# Altium PCB nRF52_UWB_MPU_ADIS_V1.0.pcbdoc
Units mil, origin at the board's own origin, x right, y up, seen from the top; angles counter-clockwise.
Board outline 44435.04 x 2724.99 mil, 2 copper layers (Top Layer, Bottom Layer); 30 components, 30 nets, 167 pads, 76 vias.
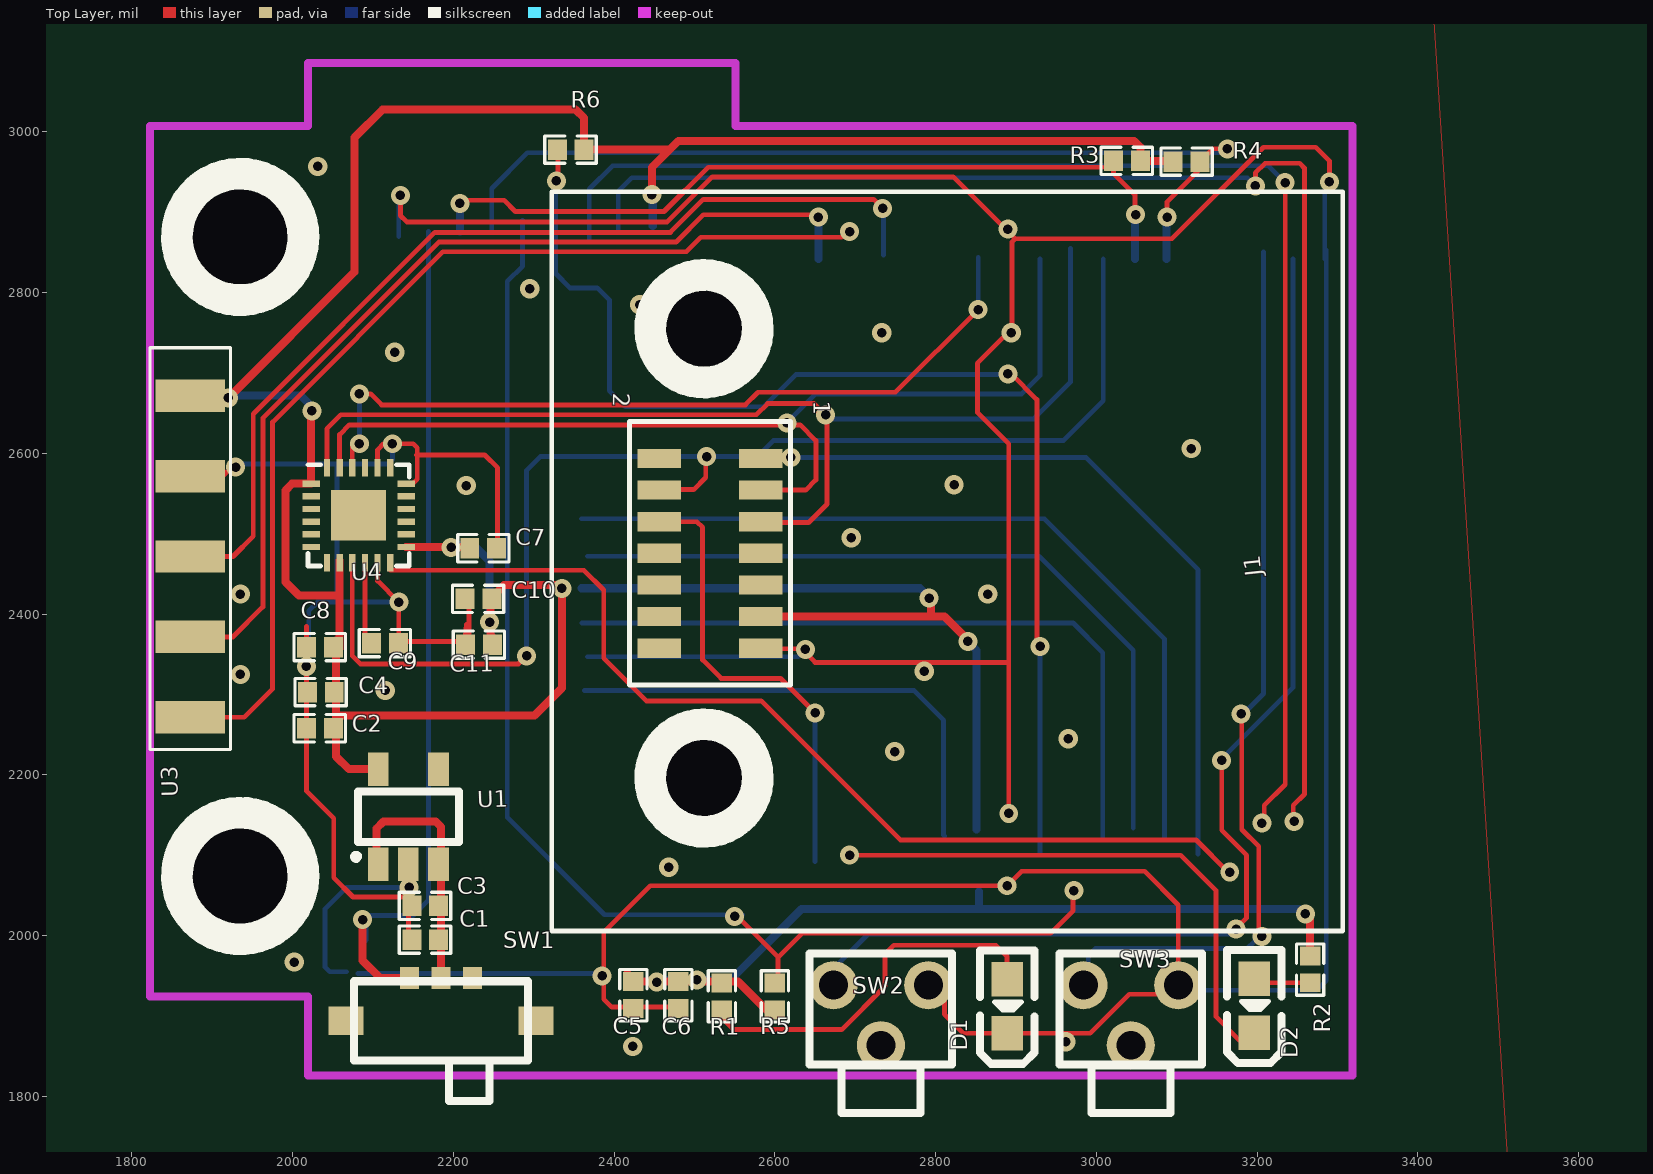
[diagram p0: Top Layer view]
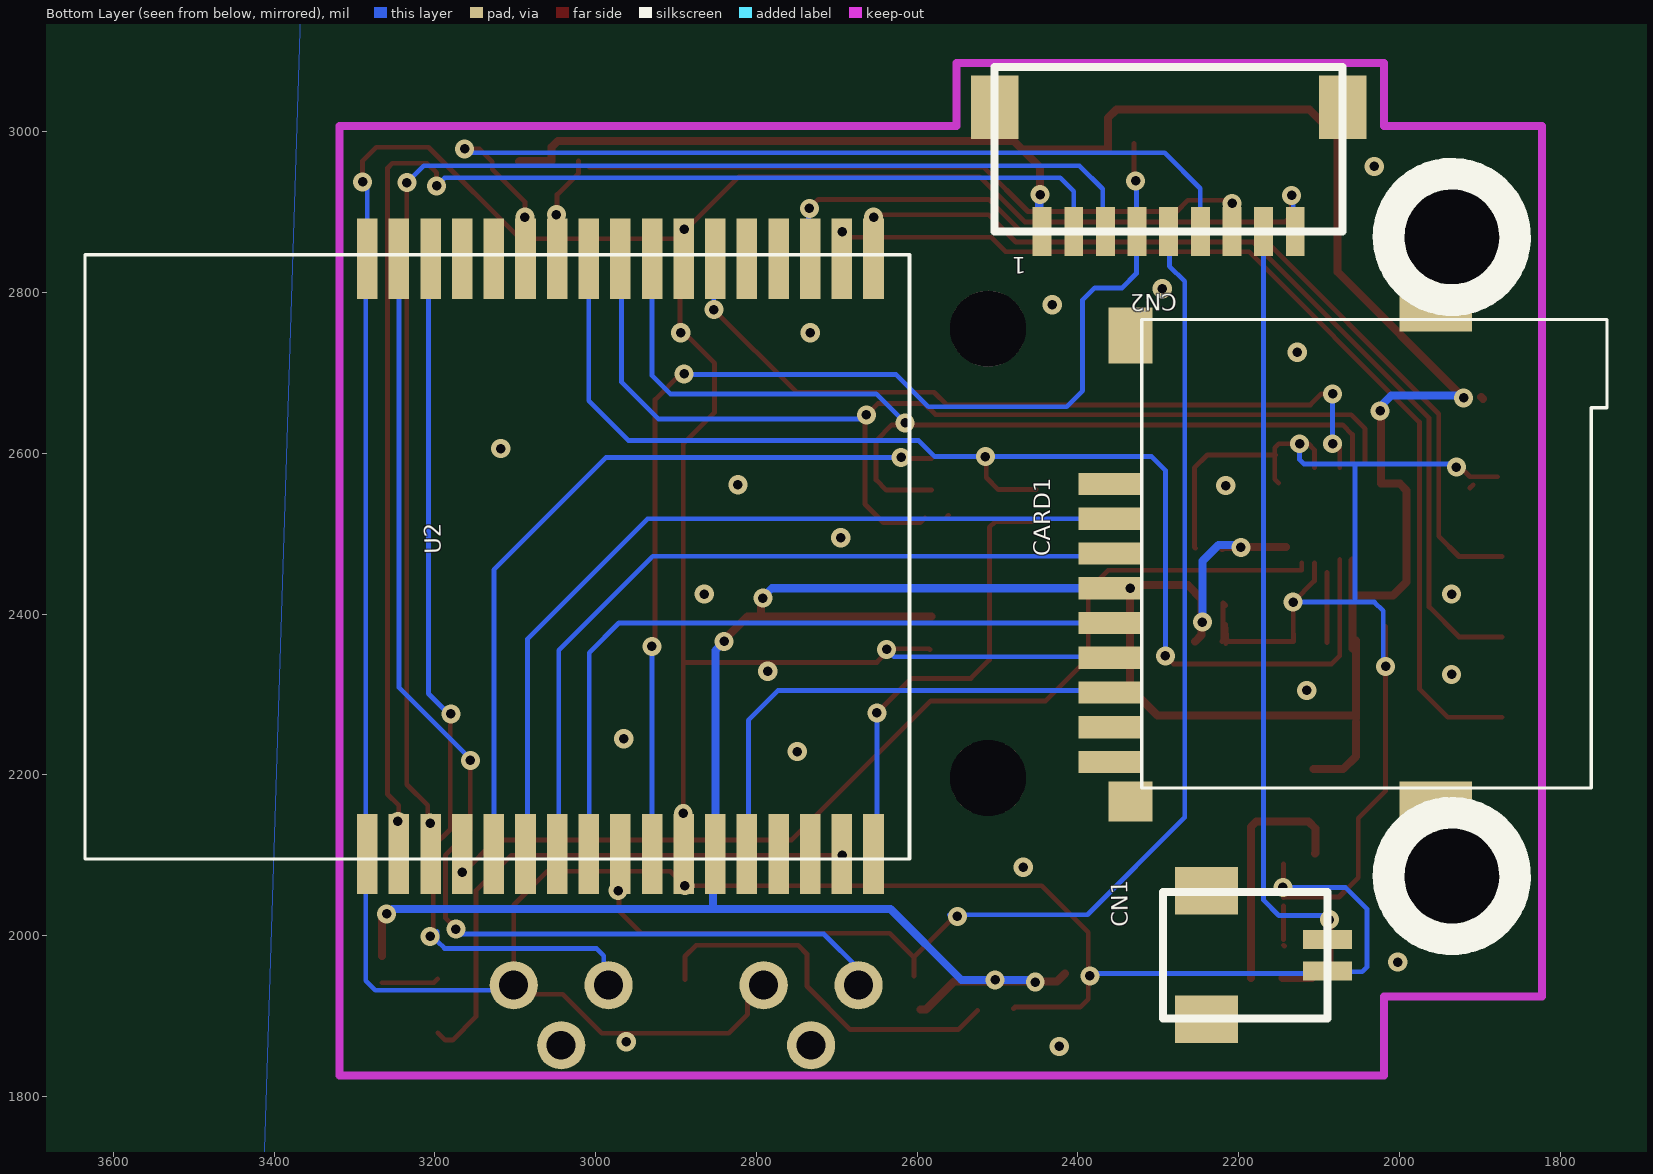
[diagram p1: Bottom Layer view, seen from below]

## Layer stack, top to bottom
Top Layer: signal copper (thickness not stored)
Dielectric: dielectric 12.6, FR-4, Dk 4.8
Bottom Layer: signal copper (thickness not stored)

## Board outline
45435.04,1000 1000,1000 1000,3724.99 45435.04,3724.99

## Components (designator, comment, footprint, x,y, rotation, side; value= is the part's Value field where it differs from the comment)
C1 "10uF" 0402#1 2165,1994.99 r0 top
C2 "10uF" 0402#1 2034,2257.99 r0 top
C3 "100nF" 0402#2 2165,2036.99 r0 top
C4 "100nF" 0402#1 2035,2302.99 r0 top
C5 "10uF" 0402#1 2424,1925.99 r90 top
C6 "100nF" 0402#2 2480,1925.99 r90 top
C7 "10nF" 0402#1 2237,2481.99 r180 top
C8 "100nF" 0402#1 2034,2358.99 r0 top
C9 "100nF" 0402#1 2115,2363.99 r0 top
C10 "10uF" 0402#1 2231,2418.99 r0 top
C11 "1uF" 0402#2 2232,2361.99 r0 top
CARD1 "HYC77-TF09-200" TF-015 2157.05,2471.71 r270 bottom
CN1 "A1002WV-S-2P" A1002WR-S-2P_LEO 2164.92,1975.65 r90 bottom
CN2 "A1002WR-S-9P" A1002WR-S-9P_LEO 2286.97,2952.03 r180 bottom
D1 "RED" LED-0603 2889,1911.99 r90 top
D2 "GREEN" LED-0603 3196.42,1912.66 r90 top
J1 "CLM-107-02-XX-D" *CLM-107-02-XX-D_2 2519.25,2475.65 r270 top
R1 "1K" 0402#1 2534,1923.99 r270 top
R2 "200" 0402#2 3266,1957.99 r90 top
R3 "10K" 0402#2 3038,2963.99 r0 top
R4 "10K" 0402#2 3112,2962.99 r180 top
R5 "10K" 0402#3 2600,1923.99 r270 top
R6 "10K" 0402#3 2346,2977.99 r0 top
SW1 "SSAJ120100" SW-SMD-5.5X2.5 2184.61,1920.53 r0 top
SW2 "KAN4562-0501C" KAN4562-0501C 2731.9,1900.89 r0 top
SW3 "KAN4562-0501C" KAN4562-0501C 3042.9,1900.89 r0 top
U1 "SPX3819M5-L-3-3/TR" SOT-23-5 2144,2147.99 r90 top
U2 "DWM1001" DWM1001 3121.61,2471.71 r270 bottom
U3 "GPS_Header" GPS_HEADER_SMT_NEW 1822.4,1955.96 r90 top
U4 "MPU-9250" QFN-24-1EP_3X3MM_PITCH0.4MM 2082,2522.99 r0 top

## Footprints (in the part's own frame and the unit in brackets; to place one, negate y for a bottom-side part, rotate by r counter-clockwise, add the part's x,y. Pads: shape width x height; smd on the part's side, far side on the other; paste and mask are expansions set on the pad)
0402#1 [mil]
  rect 23.62x25.6 smd: 1(-16.7,0) 2(16.7,0)
  silkscreen extent -32,-17 32,17
0402#2 [mil]
  rect 23.62x25.59 smd: 1(-16.7,0) 2(16.7,0)
  silkscreen extent -32,-17 32,17
0402#3 [mil]
  rect 23.62x25.58 smd: 1(-16.7,0) 2(16.7,0)
  silkscreen extent -32,-17 32,17
*CLM-107-02-XX-D_2 [mil]
  rect 24x54 smd: 1(-118.11,63) 2(-118.11,-63) 3(-78.74,63) 4(-78.74,-63) 5(-39.37,63) 6(-39.37,-63) 7(0,63) 8(0,-63) 9(39.37,63) 10(39.37,-63) 11(78.74,63) 12(78.74,-63) 13(118.11,63) 14(118.11,-63)
  round 94.49 hole 94.48 unplated: ""(-279.53,-7.48) ""(279.53,-7.48)
  silkscreen extent -450,-197 470,787
A1002WR-S-2P_LEO [mm]
  rect 0.6x1.55 smd: 1(-0.501,-1.924) 2(0.499,-1.924)
  rect 1.5x2 smd: 3(-2.032,1.905) 4(2.032,1.905)
  silkscreen extent -2,-1.92 2,3.27
A1002WR-S-9P_LEO [mm]
  rect 0.6x1.55 smd: 1(-4,-1.923) 2(-3,-1.923) 3(-1.997,-1.926) 4(-1,-1.923) 5(0,-1.923) 6(1,-1.923) 7(1.999,-1.923) 8(3,-1.923) 9(4,-1.923)
  rect 1.5x2 smd: 10(-5.499,1.999) 11(5.5,1.999)
  silkscreen extent -5.5,-1.92 5.5,3.28
DWM1001 [mm]
  rect 2.54x0.65 smd: 1(9.404,-4.129) 2(9.404,-3.129) 3(9.404,-2.129) 4(9.404,-1.129) 5(9.404,-0.129) 6(9.404,0.871) 7(9.404,1.871) 8(9.404,2.871) 9(9.404,3.871) 10(9.404,4.871) 11(9.404,5.871) 12(9.404,6.871) 13(9.404,7.871) 14(9.404,8.871) 15(9.404,9.871) 16(9.404,10.871) 17(9.404,11.871) 18(-9.406,11.871) 19(-9.406,10.871) 20(-9.406,9.871) 21(-9.406,8.871) 22(-9.406,7.871) 23(-9.406,6.871) 24(-9.406,5.871) 25(-9.406,4.871) 26(-9.406,3.871) 27(-9.406,2.871) 28(-9.406,1.871) 29(-9.406,0.871) 30(-9.406,-0.129) 31(-9.406,-1.129) 32(-9.406,-2.129) 33(-9.406,-3.129) 34(-9.406,-4.129)
  silkscreen extent -9.54,-13.05 9.56,13.02
GPS_HEADER_SMT_NEW [mm]
  rect 1.02x2.2 smd: 1(18.18,-1.27) 2(15.64,-1.27) 3(13.1,-1.27) 4(10.56,-1.27) 5(8.02,-1.27)
  round 3 hole 3 slot 3 at 90 deg unplated: ""(3,-2.85) ""(23.2,-2.85)
  silkscreen extent 1,-4.85 25.2,0
KAN4562-0501C [mil]
  round 60 hole 36: 0(0,-37.4) 1(-59.05,37.4) 2(59.06,37.4)
  silkscreen extent -89,-122 89,77
LED-0603 [mil]
  rect 43x39 smd: 1(33.5,0) 2(-33.5,0)
  silkscreen extent -72,-34 70,34
QFN-24-1EP_3X3MM_PITCH0.4MM [mil]
  rect 21.65x7.87 smd: 1(-59.06,39.37) 2(-59.06,23.62) 3(-59.06,7.87) 4(-59.06,-7.87) 5(-59.06,-23.62) 6(-59.06,-39.37) 13(59.06,-39.37) 14(59.06,-23.62) 15(59.06,-7.87) 16(59.06,7.87) 17(59.06,23.62) 18(59.06,39.37)
  rect 7.87x21.65 smd: 7(-39.36,-59.06) 8(-23.62,-59.06) 9(-7.87,-59.06) 10(7.88,-59.06) 11(23.62,-59.06) 12(39.38,-59.06) 19(39.38,59.05) 20(23.62,59.05) 21(7.88,59.05) 22(-7.87,59.05) 23(-23.62,59.05) 24(-39.36,59.05)
  rect 34.45x31.5 smd: 25(-17.12,-15.75) 25(-17.12,15.75) 25(17.13,-15.75) 25(17.13,15.75)
  silkscreen extent -63,-63 63,63
SOT-23-5 [mm]
  rect 1.06x0.65 smd: 1(-1.5,0.95) 2(-1.5,0) 3(-1.5,-0.95) 4(1.5,-0.95) 5(1.5,0.95)
  silkscreen extent -1.33,-1.6 0.8,1.71
SW-SMD-5.5X2.5 [mm]
  rect 0.6x0.7 smd: 1(-1,0.675) 2(1,0.675) C(0,0.675)
  rect 1.1x0.9 smd: 4(-3,-0.675) 5(3,-0.675)
  silkscreen extent -2.75,-3.21 2.75,0.58
TF-015 [mm]
  rect 0.7x2 smd: 1(-2.292,-5.145) 2(-1.192,-5.143) 3(-0.096,-5.145) 4(1.004,-5.145) 5(2.103,-5.145) 6(3.201,-5.145) 7(4.297,-5.145) 8(5.395,-5.145) 9(6.499,-5.145)
  rect 1.27x1.397 smd: 10(7.747,-4.507)
  rect 1.27x2.286 smd: 11(7.747,5.145) 12(-7.747,5.145)
  rect 1.778x1.397 smd: 13(-6.985,-4.507)
  silkscreen extent -7.49,-4.15 7.32,10.56

## Via types
v1: diameter 23.62, hole 11.82, Top Layer to Bottom Layer, 55 vias
v2: diameter 24, hole 11.82, Top Layer to Bottom Layer, 21 vias

## Nets (pads, with @x,y where several pads share a name; then routed paths per layer and width w, separated by ;. In a path a pad name is that pad's centre, name@x,y a point inside that pad or via, vN(x,y) a via of type N, cw(c..) or ccw(c..) an arc to the next point about the centre after c; other vN are vias at no path point)
BUTTON_RST: SW2.1 U2.33 | length 1431.7
  Top Layer w6: v1@3156,2219.99 3156,2130.99 3187,2099.99 3187,2021.99 3181.65,2016.64 v1@3170.65,2016.64
  Bottom Layer w6: SW2.1 2672.8,1958.79 2716,2001.99 3168,2001.99 v1(3174,2007.99) ; v1@3155,2218.99 3244.79,2308.78 U2.33
  other v1: 3156,2217.99
BUTTON_SDCARD: SW3.1 U2.32 | length 1142
  Top Layer w6: v1(3180,2275.99) 3181,2274.99 3181,2131.99 3202,2110.99 v1@3202,1998.99
  Bottom Layer w6: SW3.1@2990,1932.99 2990,1974.99 2999,1983.99 3188,1983.99 3197,1992.99 v1@3197,2004.99 ; v1@3181.5,2274.49 3208,2300.99 U2.32@3208,2850.99
  other v1: 3206,1998.99
CHARGE_VC: CN1.2 CN2.8 SW1.1 | length 1068.5
  Top Layer w10: v1@2088,2019.99 2087,2018.99 2087,1968.99 2108.89,1947.1 SW1.1
  Bottom Layer w6: v1(2087,2019.99) 2092,2024.99 2150,2024.99 2168.87,2043.86 CN2.8
  Bottom Layer w10: v1(2087,2019.99) 2089.16,2017.83 CN1.2
D2_1: D2.1 R2.1 | length 71.6
  Top Layer w6: D2.1 3201.29,1941.29 R2.1
FOOT_2: CN2.4 R6.1 U2.10 | length 1493.8
  Top Layer w6: v1(2328,2938.99) 2330,2940.99 R6.1@2330,2985.99 ; v1(2890,2698.99) 2894,2698.99 2926,2666.99 2926,2363.99 v1(2930,2359.99)
  Bottom Layer w6: v1@2327,2937.99 2327,2823.99 2345,2805.99 2379,2805.99 2394,2790.99 2394,2677.99 2414,2657.99 2586,2657.99 2626,2697.99 v1@2890,2697.99 ; U2.10 v1@2929.83,2360.99
FOOT_5: CN2.5 R5.1 U2.9 | length 1610.1
  Top Layer w6: v1@2550,2026.99 2604,1972.99 ; R5.1@2604,1949.69 2604,1972.99 ; v1(2972,2055.99) 2971,2054.99 2971,2030.99 2943,2002.99 2634,2002.99 2604,1972.99
  Bottom Layer w6: CN2.5@2286,2889.99 2286,2832.99 2267,2813.99 2267,2146.99 2388,2025.99 v1@2560,2025.99
  other v1: 2550,2023.99
FOOT_6: CN2.6 R4.1 U2.29 | length 1160.5
  Top Layer w6: v1@3087,2892.99 v1(3088,2893.99) 3088,2912.99 3128.7,2953.69 R4.1 3144.7,2978.99 v1(3163,2978.99)
  Bottom Layer w6: CN2.6 2247.59,2929.58 2292,2973.99 v1@3156,2973.99
  Bottom Layer w10: U2.29 3087.31,2893.3 v1(3088,2893.99)
FOOT_7: CN2.7 R3.1 U2.28 | length 998.3
  Top Layer w6: v1@2207,2914.99 2263,2914.99 2277,2900.99 2462,2900.99 2517,2955.99 3008,2955.99 ; R3.1 3021.3,2948.69 3048,2921.99 3048,2897.99 v1@3047,2896.99
  Bottom Layer w10: v1(2208,2910.99) 2208,2876.57 CN2.7 ; U2.28 3047.94,2895.93 v1(3049,2896.99)
GND: C1.1 C2.1 C3.1 C4.1 C5.1 C6.1 C7.1 C8.1 C9.2 C10.1 C11.1 CARD1.6 CN1.1 CN2.9 D1.2 J1.13 SW2.2 SW3.2 U1.2 U2.1 U2.11 U2.24 U2.34 U3.2 U4.11 U4.18 U4.20 | length 7612.2
  Top Layer w6: U3.2@1878,2570.99 1912,2570.99 v1@1927,2585.99 ; U3.2@1908,2560.99 U3.2@1912,2556.99 ; 2017.3,2384.99 2017.3,2179.69 2051,2145.99 2051,2071.99 2075,2047.99 2143,2047.99 2144,2046.99 U1.2 ; U4.11 2105.62,2441.37 v1(2132,2414.99) 2132,2386.69 2131.7,2365.99 2214,2365.99 2216,2386.99 C11.1@2216,2363.1 ; U4.20 2105.62,2604.62 2113,2611.99 2150,2611.99 2155,2606.99 2155,2567.99 U4.18@2150,2562.99 ; v1(2134,2920.99) 2134,2895.99 2142,2887.99 2466,2887.99 2522,2943.99 2822,2943.99 2899,2866.99 ; C1.1@2143,1986.99 C1.1@2144,1987.99 ; C1.1@2144,1994.99 C3.1@2144,2036.99 ; 2154,2597.99 2239,2597.99 2255,2581.99 2255,2483.29 C7.1 ; C10.1@2216,2410.88 2219.32,2414.2 2219.32,2367.27 C11.1@2220.6,2365.99 ; C6.1 2478.3,1910.99 2397,1910.99 2387,1920.99 2387,2003.99 2445,2061.99 v1(2889,2061.99) 2907,2079.99 3060,2079.99 3101.93,2038.06 SW3.2@3101.93,1938.25 ; J1.13@2584,2355.99 2585,2356.99 2633,2356.99 2650,2339.99 2890,2339.99 ; SW2.2@2811,1932.99 2811,1901.99 2834.5,1878.49 2992.5,1878.49 3041,1926.99 3104,1926.99 SW3.2@3108,1922.99 ; v1(2891,2151.99) 2891,2611.99 2852,2650.99 2852,2711.99 2895,2754.99 2895,2862.99 2899,2866.99 ; v1@3290,2931.99 3290,2963.99 3273,2980.99 3208,2980.99 3094,2866.99 2899,2866.99
  Bottom Layer w6: v1@1927,2583.99 1930,2586.99 2119,2586.99 2124,2591.99 v1(2124,2611.99) ; v1@2020,2338.99 2020,2403.99 2031,2414.99 v1(2132,2414.99) ; 2054,2414.99 2055,2415.99 2055,2586.99 ; CN1.1@2067,1954.99 2046,1954.99 2040,1960.99 2040,2032.99 2067,2059.99 v1(2145,2059.99) ; CN1.1@2081,1952.99 2383,1952.99 v1@2386,1949.99 ; CN2.9@2132,2869.99 2132,2918.99 v1(2134,2920.99) ; CARD1.6@2367,2346.99 2629,2346.99 v1(2638,2355.99) ; SW3.2@3101.93,1938.25 3108.19,1931.99 3274,1931.99 3286,1943.99 U2.34@3286,2852.99 ; U2.34 3284.16,2935.15 v1@3286,2936.99
  other v1: 2385,1949.99 2017,2334.99 1929,2582.99 2890,2878.99 3290,2937.99
  other v2: 2423,1861.99 2962,1867.99 2002,1966.99 2468,2084.99 2749,2228.99 2965,2244.99 2115,2304.99 1935,2324.99 2786,2328.99 1935,2424.99 2865,2424.99 2695,2494.99 2216,2559.99 2823,2560.99 3118,2605.99 2127,2725.99 2733,2749.99 2894,2749.99 2432,2784.99 2295,2804.99 2031,2956.99
GPS_1PPS: U2.19 U3.5 | length 1262.4
  Top Layer w6: U3.5 1939.72,2271.71 1975,2306.99 1975,2638.99 2186.96,2850.95 2489.96,2850.95 2508,2868.99 2683,2868.99 v1@2690,2875.99
  other v1: 2693,2875.99
GPS_UART_RX: U2.18 U3.4 | length 1186.9
  Top Layer w6: U3.4 1925.72,2371.71 1963,2408.99 1963,2643.99 2181.98,2862.97 2476.98,2862.97 2511,2896.99 v1@2652,2896.99
  Bottom Layer w10: v1(2654,2893.99) 2654.24,2893.75 U2.18
GPS_UART_TX: U2.20 U3.3 | length 1197.6
  Top Layer w6: U3.3 1925.72,2471.71 1951,2496.99 1951,2648.99 2177,2874.99 2470,2874.99 2511,2915.99 2723,2915.99 v1(2734,2904.99)
  Bottom Layer w6: v1(2734,2904.99) 2735,2903.99 U2.20@2735,2846.99
INT_IMUA: U2.4 U4.12 | length 1258.7
  Top Layer w6: U4.12 2121.38,2454.62 2362.38,2454.62 2387,2429.99 2387,2344.99 2440,2291.99 2583,2291.99 2756,2118.99 3124,2118.99 v1@3165,2077.99
  other v1: 3166,2078.99
INT_IMUB: J1.1 U2.5 | length 956.6
  Top Layer w6: J1.1 2618.77,2593.76 v1(2620,2594.99)
  Bottom Layer w6: v1(2620,2594.99) 2987,2594.99 3126.68,2455.31 U2.5
LED_R: D2.2 U2.16 | length 694.5
  Top Layer w6: v1(2693,2099.99) 3105,2099.99 3149,2055.99 3149,1898.99 3178,1869.99 3187.25,1869.99 D2.2
R1_2: D1.1 R1.2 | length 475
  Top Layer w6: R1.2@2525,1906.69 2548.7,1882.99 2683,1882.99 2737,1936.99 2737,1976.99 2748,1987.99 2875,1987.99 2889,1973.99 D1.1
SDCARD_CLK: CARD1.5 U2.8 | length 893.7
  Bottom Layer w6: CARD1.5 2971.06,2388.93 3008,2351.99 U2.8@3008,2121.99
SDCARD_MISO: CARD1.7 U2.13 | length 606.7
  Bottom Layer w6: CARD1.7@2363,2304.99 2773,2304.99 2810,2267.99 2810,2124.99 U2.13@2811,2123.99
SDCARD_MOSI: CARD1.3 U2.7 | length 948.5
  Bottom Layer w6: CARD1.3@2367,2471.99 2929,2471.99 3046,2354.99 U2.7@3046,2133.99
SDCARD_NCS: CARD1.2 U2.6 | length 1035.4
  Bottom Layer w6: CARD1.2 2935.29,2518.64 3085,2368.93 U2.6@3085,2120.99
SPI_CLK: J1.3 U2.25 U4.23 | length 1248.3
  Top Layer w6: U4.23@2058.38,2588.04 2058.38,2623.37 2070.38,2635.37 2631.63,2635.37 2651,2615.99 2651,2566.99 2638.4,2554.39 J1.3
  Bottom Layer w6: v1(2615,2637.99) 2651,2673.99 2907,2673.99 2929.83,2696.82 U2.25
SPI_MISO: J1.4 U2.27 U4.9 | length 1600.8
  Top Layer w6: U4.9@2074,2467.99 2074,2347.99 2084,2337.99 2281,2337.99 v1(2291,2347.99) ; J1.4@2452,2554.99 2499,2554.99 2514,2569.99 2514,2594.99 v1(2515,2595.99)
  Bottom Layer w6: v1(2291,2347.99) 2291,2578.99 2308,2595.99 2578,2595.99 2598,2615.99 2959,2615.99 3008.57,2665.56 U2.27
SPI_MOSI: J1.5 U2.26 U4.24 | length 1386.6
  Top Layer w6: U4.24@2042.64,2588.04 2042.64,2630.63 2060,2647.99 2577,2647.99 2591,2661.99 2649,2661.99 v1(2663,2647.99) ; J1.5@2561,2522.99 J1.5@2564,2519.99 ; J1.5@2590,2519.99 2596,2513.99 2642,2513.99 2665,2536.99 2665,2639.99 v1@2654,2650.99
  Bottom Layer w6: v1@2658,2642.99 2922,2642.99 2968,2688.99 U2.26@2968,2854.99
SPI_NCS_IMUA: U2.23 U4.22 | length 989.1
  Top Layer w6: v1@2074,2607.99 2074.13,2607.87 U4.22 ; v1@2080,2673.99 2097,2673.99 2110.62,2660.37 2563.38,2660.37 2579,2675.99 2750,2675.99 v1(2853,2778.99)
  Bottom Layer w6: v1@2080,2673.99 2083,2670.99 v1(2083,2611.99) ; v1@2848,2773.99 v1(2853,2778.99) U2.23@2853,2843.99
  other v1: 2083,2673.99
SPI_NCS_IMUB: J1.6 U2.17 | length 574
  Top Layer w6: J1.6 2502.97,2515.02 2510,2507.99 2510,2342.99 2533,2319.99 2607,2319.99 v1(2650,2276.99)
  Bottom Layer w6: U2.17@2650,2091.99 v1(2650,2276.99)
SWD_CLK: CN2.2 U2.2 | length 1758.1
  Top Layer w6: v1(3198,2932.99) 3198,2948.99 3210,2960.99 3253,2960.99 3259,2954.99 3259,2175.99 3245,2161.99 v1@3245,2140.99
  Bottom Layer w6: CN2.2 2405.09,2926.08 2422,2942.99 3188,2942.99 v1(3198,2932.99)
  other v1: 3246,2141.99
SWD_DIO: CN2.3 U2.3 | length 1752.5
  Top Layer w6: v1@3209,2144.99 3209,2161.99 3235,2187.99 v1(3235,2936.99)
  Bottom Layer w6: CN2.3@2369,2865.99 2369,2928.99 2398,2957.99 3214,2957.99 v1(3235,2936.99)
  other v1: 3206,2139.99
U4_10: C9.1 U4.10 | length 87.4
  Top Layer w6: C9.1@2089.88,2364.56 2089.88,2451.93
VCC3.3: C2.2 C4.2 C5.2 C6.2 C7.2 C8.2 C10.2 C11.2 CARD1.4 CN2.1 J1.11 R1.1 R2.2 R3.2 R4.2 R5.2 R6.2 U1.5 U2.12 U3.1 U4.1 U4.8 U4.13 | length 5218.7
  Top Layer w10: U3.1@1896,2667.99 U3.1@1898,2669.99 ; v1(1920,2668.99) 2077,2825.99 2077,2992.99 2112,3027.99 2352,3027.99 2362.7,3017.29 R6.2 2469,2977.99 ; v1@2022.94,2654.05 U4.1 1999.37,2562.36 1991,2553.99 1991,2439.99 2008,2422.99 2056.38,2422.99 2058.38,2420.99 ; C2.2@2054,2265.99 2054,2222.99 2069.96,2207.03 U1.5 ; C8.2@2054,2366.99 2054,2270.99 2057,2273.99 2301,2273.99 2335,2307.99 v1(2335,2431.99) 2331,2435.99 2263,2435.99 2246,2418.99 2246,2373.99 C11.2@2254,2365.99 ; C8.2@2058,2356.99 U4.8@2058,2466.99 ; U4.13 2218.67,2483.62 C7.2 ; C5.2@2416,1952.99 2426,1942.99 2554,1942.99 2589,1907.99 R5.2@2595.7,1907.99 ; v1@2447,2917.99 2447,2955.99 2480,2988.99 3047,2988.99 3054.7,2981.29 R3.2 3094.3,2963.99 R4.2 ; J1.11 2811.08,2396.91 v1@2844,2363.99 ; v1(2792,2419.99) 2794,2417.99 2794,2400.99 ; v1(3260,2026.99) 3266,2020.99 R2.2
  Bottom Layer w10: v1(1920,2668.99) 1923,2671.99 2010,2671.99 2024,2657.99 v1(2024,2652.99) ; v1@2200,2482.99 2203,2485.99 2225,2485.99 2245,2465.99 v1(2245,2389.99) ; CARD1.4 2780.8,2432.19 v1@2795,2417.99 ; CN2.1@2448,2882.99 v1@2448,2915.99 ; v1(2453,1941.99) 2456,1944.99 2545,1944.99 2633,2032.99 3253,2032.99 3259,2026.99 v1(3260,2026.99) ; v1(2840,2365.99) 2851,2354.99 U2.12@2851,2131.99 ; 2854,2032.99 U2.12@2854,2054.99
  other v1: 2503,1944.99 2197,2482.99 2447,2921.99
VCC3.7: C1.2 C3.2 SW1.C U1.1 U1.3 | length 306.8
  Top Layer w10: U1.1@2105,2101.99 2104,2102.99 2104,2132.99 2113,2141.99 2178,2141.99 2184.61,2135.38 SW1.C
pads on no net: CARD1.1 CARD1.8 CARD1.9 CARD1.10 CARD1.11 CARD1.12 CARD1.13 CN1.3 CN1.4 CN2.10 CN2.11 J1. J1.2 J1.7 J1.8 J1.9 J1.10 J1.12 J1.14 SW1.2 SW1.4 SW1.5 SW2.0 SW3.0 U1.4 U2.14 U2.15 U2.21 U2.22 U2.30 U2.31 U3. U4.2 U4.3 U4.4 U4.5 U4.6 U4.7 U4.14 U4.15 U4.16 U4.17 U4.19 U4.21 U4.25

## Polygon pours and split planes (outlines as drawn)
GND on Bottom Layer (solid): 1635,3184.99 1575,1554.99 3415,1634.99 3365,3204.99
GND on Top Layer (solid): 1655,3174.99 1675,1644.99 3515,1674.99 3415,3224.99 3405,3224.99

## Silkscreen, mask and mechanical layers (free items; w line width, h text height)
Document:
  lines w0.1: 23216.52,2361.5 23218.52,2363.5

## Text inside footprints (layer, text, board x,y; h text height)
CN2: Bottom Overlay "1" at 2464.15,2851.11 h35 r180
J1: Top Overlay "2" at 2391.84,2675.62 h35 r269; Top Overlay "1" at 2641.76,2665.64 h35 r270
U3: Mechanical 3 "37.4" at 2585.56,1534.99 h35 r179; Mechanical 3 "26.2" at 1535,2365.41 h35 r90